# EAGLE board midiext-led-001 (EAGLE 8.6.3)
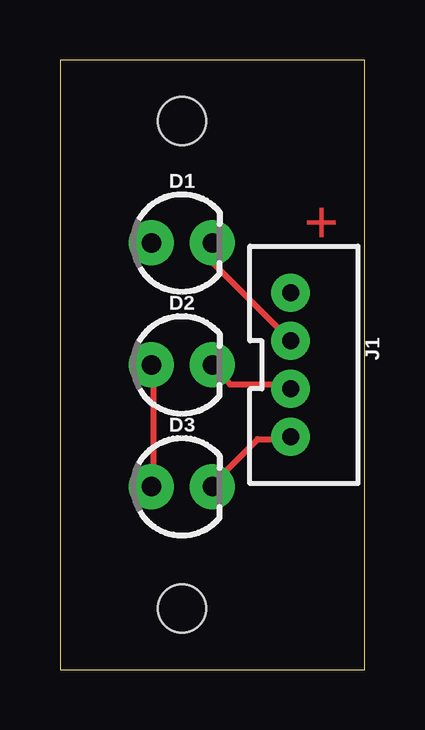
[diagram p0: board, top side]
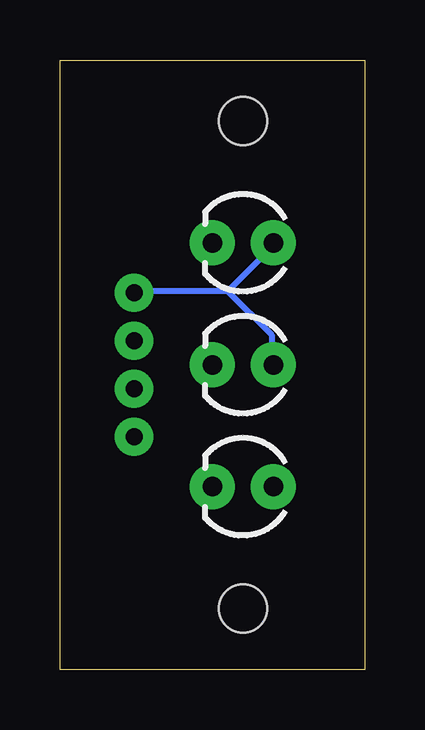
[diagram p1: board, bottom side, seen from below]

Size 12.7 x 25.4 mm. Coordinates in mm from the lower left corner, seen from the top.
Outline: 0,0 12.7,0 12.7,25.4 0,25.4 0,0
Copper layers (1*16): Top 0.035mm / dielectric 1.5mm / Bottom 0.035mm
Design rules "default": minimum track width 10mil, minimum drill 24mil, track to track 8mil, track to pad 8mil, pad to pad 8mil, via to via 8mil, smd to smd 8mil, copper to edge 40mil, drill to drill 8mil, minimum pad ring 10mil, minimum via ring 8mil, stop-mask expansion 4mil, vias tented up to drill 0mil, thermal gap 10mil
Holes 2 mm at 5.08,2.54 5.08,22.86

## Footprints (pad centres in the part's own frame; a part is rotated, then mirrored left to right if it is on the bottom)
LED_3MM = drill 0.813 pad 1.88: A -1.27,0; K 1.27,0
JST-4-PTH-VERT = drill 0.7 pad 1.6: 1 -3,-0.55; 2 -1,-0.55; 3 1,-0.55; 4 3,-0.55

## Placement (x,y rotation side)
D1  PWR  [LED_3MM]  5.08,17.78 0 top
D2  OUT  [LED_3MM]  5.08,12.7 0 top
D3  IN  [LED_3MM]  5.08,7.62 0 top
J1  LED  [JST-4-PTH-VERT]  10.16,12.7 270 top

## Library data of the parts
D1-D3 = SparkFun-LED; PROD_ID: DIO-08794
J1 = SparkFun-Connectors; PROD_ID: CONN-13251

## Nets
N$4: D1.A D2.A D3.A J1.1
N$5: D1.K J1.2
N$11: D2.K J1.3
N$12: D3.K J1.4

## Tracks (layer width: path | path; a pad name or v marks a point on that pad's centre or on a via)
N$4
  Top 0.254: D3.A 3.89,7.77 3.89,12.57 D2.A
  Bottom 0.254: 5.71,15.77 9.6,15.77 J1.1 | 5.71,15.77 3.89,17.6 D1.A | 5.71,15.77 3.89,13.95 3.89,12.8 D2.A
N$5
  Top 0.254: J1.2 9.6,13.72 6.4,16.92 6.4,17.6 D1.K
N$11
  Top 0.254: J1.3 9.6,11.89 7.09,11.89 6.4,12.57 D2.K
N$12
  Top 0.254: J1.4 9.6,9.6 8.23,9.6 6.4,7.77 D3.K

## Text on the board
Top: +